# Altium PCB showroom_v1_pcb.PcbDoc
Units mil, origin at the board's own origin, x right, y up, seen from the top; angles counter-clockwise.
Board outline 6102.36 x 2362.2 mil, 2 copper layers (Top Layer, Bottom Layer); 89 components, 68 nets, 263 pads, 86 vias.
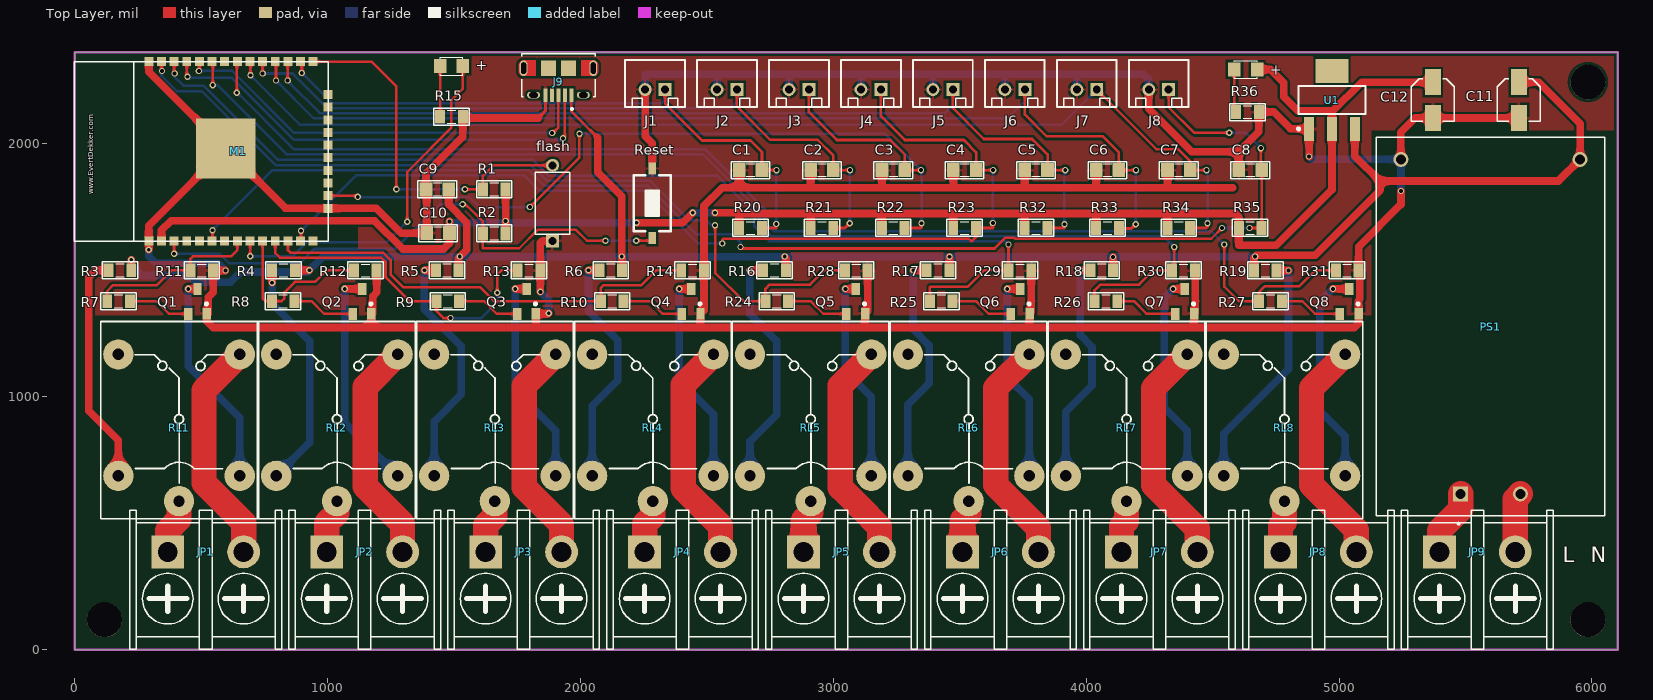
[diagram p0: Top Layer view]
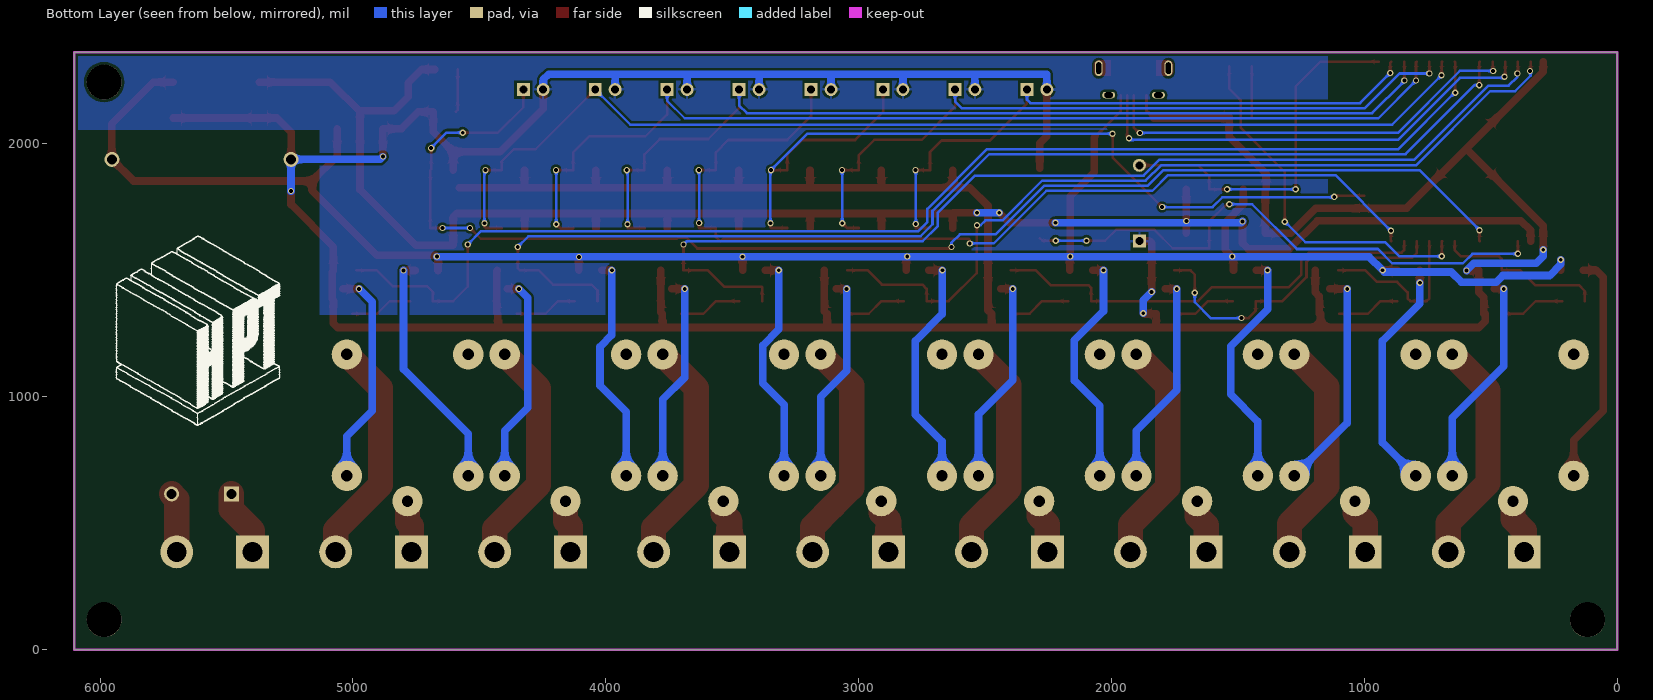
[diagram p1: Bottom Layer view, seen from below]
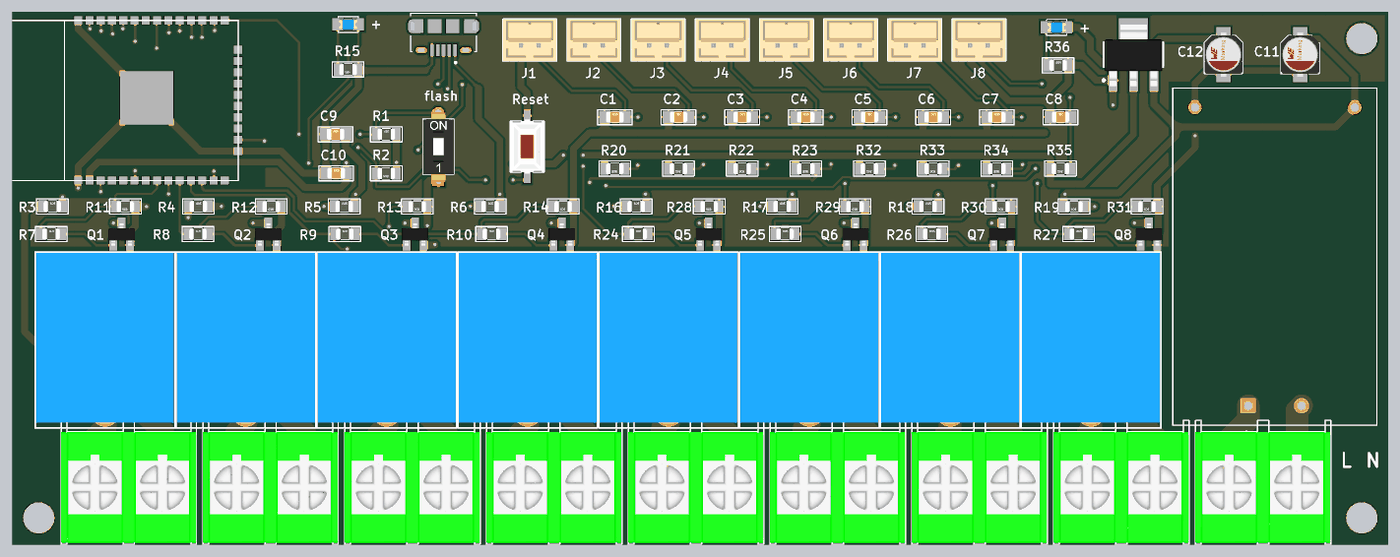
[diagram p2: 3D render of the assembled board from above, using the file's embedded part models]

## Layer stack, top to bottom
Top Solder: solder mask 0.4, Solder Resist, Dk 3.5
Top Layer: signal copper 1.4
Dielectric 1: dielectric 12.6, FR-4, Dk 4.8
Bottom Layer: signal copper 1.4
Bottom Solder: solder mask 0.4, Solder Resist, Dk 3.5

## Board outline
0,0 0,2362.2 6102.36,2362.2 6102.36,0

## Design rules (kind name [scope] priority, off if disabled: settings)
Clearance [All] p1: gap=10
PolygonConnect [All] p1: connectstyle=Relief reliefconductorwidth=10 reliefentries=4 polygonreliefangle="90 Angle" airgapwidth=10
RoomDefinition showroom_v1_schematic [InComponentClass('showroom_v1_schematic')] p1: confinementstyle=ConfineIn formatcopy=TRUE lockcomponents=FALSE outline 6369.13,-30 27524.13,-30 27524.13,1630 6369.13,1630
RoutingVias [All] p1: holewidth=15 width=25 viastyle="Through Hole" minholewidth=15 minwidth=25 maxholewidth=25 maxwidth=70
SolderMaskExpansion [All] p1: expansion=4
Width [All] p1: maxlimit=120 minlimit=10 preferedwidth=10
30 further rules are at their usual default settings.

## Components (designator, comment, footprint, x,y, rotation, side; value= is the part's Value field where it differs from the comment)
+ "LED" LED-0805-Blue 4676,2294 r180 top (schematic designator LED2)
+ "LED" LED-0805-Blue 1535,2307 r180 top (schematic designator LED1)
C1 "104" SM-CAP-0805 2628,1896 r0 top
C2 "104" SM-CAP-0805 2910.29,1896 r0 top
C3 "104" SM-CAP-0805 3192.57,1896 r0 top
C4 "104" SM-CAP-0805 3474.86,1896 r0 top
C5 "104" SM-CAP-0805 3757.14,1896 r0 top
C6 "104" SM-CAP-0805 4039.43,1896 r0 top
C7 "104" SM-CAP-0805 4321.71,1896 r0 top
C8 "104" SM-CAP-0805 4604,1896 r0 top
C9 "104" SM-CAP-0805 1389,1820 r0 top
C10 "104" SM-CAP-0805 1392,1647 r0 top
C11 "CN-ALU-SMD" CAP-ALU-SMD-4.5x5x1.4 5711,2173 r270 top
C12 "CN-ALU-SMD" CAP-ALU-SMD-4.5x5x1.4 5371,2173 r270 top
flash "SW" SW-DIP1 1890,1765 r0 top (schematic designator flash1)
J1 "62000211622" 62000211622 2295.13,2238 r0 top
J2 "62000211622" 62000211622 2579.69,2238 r0 top
J3 "62000211622" 62000211622 2864.24,2238 r0 top
J4 "62000211622" 62000211622 3148.79,2238 r0 top
J5 "62000211622" 62000211622 3433.34,2238 r0 top
J6 "62000211622" 62000211622 3717.9,2238 r0 top
J7 "62000211622" 62000211622 4002.45,2238 r0 top
J8 "62000211622" 62000211622 4287,2238 r0 top
J9 "10118194-0001LF" AMPHENOL_10118194-0001LF 1913,2299 r180 top
JP1 "JP2" "CON 2/7.62mm" 368,386 r0 top
JP2 "JP2" "CON 2/7.62mm" 996.62,386 r0 top
JP3 "JP2" "CON 2/7.62mm" 1625.25,386 r0 top
JP4 "JP2" "CON 2/7.62mm" 2253.88,386 r0 top
JP5 "JP2" "CON 2/7.62mm" 2882.5,386 r0 top
JP6 "JP2" "CON 2/7.62mm" 3511.12,386 r0 top
JP7 "JP2" "CON 2/7.62mm" 4139.75,386 r0 top
JP8 "JP2" "CON 2/7.62mm" 4768.38,386 r0 top
JP9 "JP2" "CON 2/7.62mm" 5397,386 r0 top
M1 "ESP32S_Module" ESP32S 1003,1615 r90 top
PS1 "HLK-5M05" CONV_HLK-5M05 5599,1277 r90 top
Q1 "C1815" SOT23B 485.55,1377 r0 top
Q2 "C1815" SOT23B 1136.27,1377 r0 top
Q3 "C1815" SOT23B 1786.98,1377 r0 top
Q4 "C1815" SOT23B 2437.7,1377 r0 top
Q5 "C1815" SOT23B 3088.42,1377 r0 top
Q6 "C1815" SOT23B 3739.14,1377 r0 top
Q7 "C1815" SOT23B 4389.86,1377 r0 top
Q8 "C1815" SOT23B 5040.57,1377 r0 top
R1 "10K" RES-SMD-0805 1659,1820 r0 top
R2 "10K" RES-SMD-0805 1659,1646 r180 top
R3 "1K" RES-SMD-0805 178.63,1500 r0 top
R4 "1K" RES-SMD-0805 825.77,1500 r0 top
R5 "1K" RES-SMD-0805 1472.9,1500 r0 top
R6 "1K" RES-SMD-0805 2120.03,1500 r0 top
R7 "1K" RES-SMD-0805 173.63,1377.5 r0 top
R8 "1K" RES-SMD-0805 824.35,1377.5 r0 top
R9 "1K" RES-SMD-0805 1475.07,1377.5 r0 top
R10 "1K" RES-SMD-0805 2125.79,1377.5 r0 top
R11 "10K" RES-SMD-0805 502.2,1499 r180 top
R12 "10K" RES-SMD-0805 1149.33,1499 r180 top
R13 "10K" RES-SMD-0805 1796.47,1499 r180 top
R14 "10K" RES-SMD-0805 2443.6,1499 r180 top
R15 "1K" RES-SMD-0805 1490,2107 r180 top
R16 "1K" RES-SMD-0805 2767.17,1500 r0 top
R17 "1K" RES-SMD-0805 3414.3,1500 r0 top
R18 "1K" RES-SMD-0805 4061.43,1500 r0 top
R19 "1K" RES-SMD-0805 4708.57,1499 r180 top
R20 "10K" RES-SMD-0805 2672.5,1667 r180 top
R21 "10K" RES-SMD-0805 2954.79,1667 r180 top
R22 "10K" RES-SMD-0805 3237.07,1667 r180 top
R23 "10K" RES-SMD-0805 3519.36,1667 r180 top
R24 "1K" RES-SMD-0805 2776.51,1377.5 r0 top
R25 "1K" RES-SMD-0805 3427.22,1377.5 r0 top
R26 "1K" RES-SMD-0805 4077.94,1377.5 r0 top
R27 "1K" RES-SMD-0805 4728.66,1377.5 r0 top
R28 "10K" RES-SMD-0805 3090.73,1499 r180 top
R29 "10K" RES-SMD-0805 3737.87,1499 r180 top
R30 "10K" RES-SMD-0805 4385,1499 r180 top
R31 "10K" RES-SMD-0805 5032.13,1499 r180 top
R32 "10K" RES-SMD-0805 3801.64,1667 r180 top
R33 "10K" RES-SMD-0805 4083.93,1667 r180 top
R34 "10K" RES-SMD-0805 4366.21,1667 r180 top
R35 "10K" RES-SMD-0805 4648.5,1667 r180 top
R36 "1K" RES-SMD-0805 4638,2126 r0 top
Reset "SW" SW1-SMD 2284,1765 r90 top (schematic designator Reset1)
RL1 "Relay 10A/12V" "RELAY 5" 412.63,912 r90 top
RL2 "Relay 10A/12V" "RELAY 5" 1037.13,912 r90 top
RL3 "Relay 10A/12V" "RELAY 5" 1661.63,912 r90 top
RL4 "Relay 10A/12V" "RELAY 5" 2286.13,912 r90 top
RL5 "Relay 10A/12V" "RELAY 5" 2910.63,912 r90 top
RL6 "Relay 10A/12V" "RELAY 5" 3535.13,912 r90 top
RL7 "Relay 10A/12V" "RELAY 5" 4159.63,912 r90 top
RL8 "Relay 10A/12V" "RELAY 5" 4784.13,912 r90 top
U1 "LM1117-3.3V" SOT223 4972,2173 r0 top

## Footprints (in the part's own frame and the unit in brackets; to place one, negate y for a bottom-side part, rotate by r counter-clockwise, add the part's x,y. Pads: shape width x height; smd on the part's side, far side on the other; paste and mask are expansions set on the pad)
62000211622 [mm] "2.00mm Male Vertical Shrouded Header, 2p"
  rect 1.3x1.3 hole 0.8: 1(1,-0.6)
  round 1.3 hole 0.8: 2(-1,-0.6)
  silkscreen extent -3,-2.35 3,2.35, body extent -3,-2.35 3,2.35, height 6.15
AMPHENOL_10118194-0001LF [mm]
  rect 0.4x1.35 smd: 1(-1.3,2.7) 2(-0.65,2.7) 3(0,2.7) 4(0.65,2.7) 5(1.3,2.7)
  oval 1.3x0.65 hole 0.55 slot 0.85 at 0 deg: S1(-2.5,2.7) S2(2.5,2.7)
  oval 0.775x1.55 hole 0.5 slot 1.15 at 90 deg: S3(-3.5,0) S6(3.5,0)
  rect 1.5x1.55 smd: S4(-1,0) S5(1,0)
  Top Layer region: 193 vertices and 0 holes, not listed, extent 2.3,-0.78 4,0.775
  Top Layer region: 193 vertices and 0 holes, not listed, extent -4,-0.775 -2.3,0.78
  silkscreen extent -3.7,-1.45 3.7,4.2
CAP-ALU-SMD-4.5x5x1.4 [mm]
  rect 2.6x1.6 smd: 1(-1.8,0) 2(1.8,0)
  silkscreen extent -2.15,-2.15 2.15,2.15, body extent -2.5,-2.15 2.5,2.15, height 5.45
"CON 2/7.62mm" [mm] "CON 2 HB9500-2P 9.5MM"
  rect 3.3x3.3 hole 2: 1(0,0)
  round 3.3 hole 2: 2(7.62,0)
  silkscreen extent -3.81,-9.78 11.43,4.19, body extent -3.84,-9.63 11.4,2.87, height 12.5
CONV_HLK-5M05 [mm]
  rect 1.5x1.5 hole 1: 1(-16.8,3)
  round 1.5 hole 1: 2(-16.8,-3) 3(16.8,9) 4(16.8,-9)
  silkscreen extent -19.9,-11.5 19,11.5
ESP32S [mm] "ESP32S-Module"
  rect 0.9x0.9 smd: 1(0,18.034) 2(0,16.764) 3(0,15.494) 4(0,14.224) 5(0,12.954) 6(0,11.684) 7(0,10.414) 8(0,9.144) 9(0,7.874) 10(0,6.604) 11(0,5.334) 12(0,4.064) 13(0,2.794) 14(0,1.524) 15(3.3,0.034) 16(4.57,0.034) 17(5.84,0.034) 18(7.11,0.034) 19(8.38,0.034) 20(9.65,0.034) 21(10.92,0.034) 22(12.19,0.034) 23(13.46,0.034) 24(14.73,0.034) 25(18.034,1.524) 26(18.034,2.794) 27(18.034,4.064) 28(18.034,5.334) 29(18.034,6.604) 30(18.034,7.874) 31(18.034,9.144) 32(18.034,10.414) 33(18.034,11.684) 34(18.034,12.954) 35(18.034,14.224) 36(18.034,15.494) 37(18.034,16.764) 38(18.034,18.034)
  rect 6x6 smd: 101(9.3,10.3)
  silkscreen extent 0,0 18.03,25.53, body extent 0,0 18.03,25.53, height 2
LED-0805-Blue [mil]
  rect 50x55 smd: 1(0,0) 2(90,0)
  silkscreen extent 0,-35 90,35, body extent 5,-25 85,25, height 43
"RELAY 5" [mil] "Reley DPDT, 8 pin, 1A, W400mil, L800mil,H 300mil"
  round 120 hole 45: 1(-325,0) 2(255,240) 3(255,-240) 4(-225,-240) 5(-225,240)
  silkscreen extent -395,-310 385,310, body extent -371,-304 381,306, height 602
RES-SMD-0805 [mil]
  rect 39.37x55 smd: 1(-45,0) 2(45,0)
  silkscreen extent -70,-34 70,33, body extent -39,-25 39,25, height 31
SM-CAP-0805 [mil]
  rect 50x55 smd: 1(0,0) 2(90,0)
  silkscreen extent -32,-34 121,33, body extent 6,-25 84,25, height 31
SOT23B [mm] "SOT 23B"
  rect 0.85x1.2 smd: 1(0.94,-1.245) 2(0,1.25) 3(-0.95,-1.25)
  silkscreen extent 0.77,-0.38 1.02,-0.13, body extent -1.5,-1.3 1.5,1.2, height 1.06
SOT223 [mm]
  rect 1x2.4 smd: 1(-2.3,-2.9) 2(0,-2.9) 3(2.3,-2.9)
  rect 3.3x2.4 smd: 4(0,2.9)
  silkscreen extent -3.47,-3.02 3.35,1.4, body extent -3.25,-3.56 3.25,3.4, height 1.68
SW1-SMD [mm]
  rect 1.2x0.8 smd: 1(-3.5,0) 2(3.5,0)
  silkscreen extent -2.82,-1.85 2.82,1.85, body extent -3.05,-1.85 3.05,1.85, height 2.5
SW-DIP1 [mm]
  rect 1.3x1.3 hole 0.8: 1(0,-3.81)
  round 1.3 hole 0.8: 2(0,3.81)
  silkscreen extent -1.74,-3.1 1.74,3.1, body extent -1.74,-3.98 1.74,3.89, height 3.95

## Part data
+ +: library part "LED SMD"
C1 C2 C3 C4 C5 C6 C7 C8 C9 C10: library part CN
C11 C12: "Polarized Capacitor (Axial)"
flash Reset: library part SW2, "Switch button 2 pin"
J1 J2 J3 J4 J5 J6 J7 J8: "WR-WTB 2.00mm Male Vertical Shrouded Header, 2p"
J9: "USB - micro B USB 2.0 Receptacle Connector 5 Position Surface Mount, Right Angle; Through Hole"
JP1 JP2 JP3 JP4 JP5 JP6 JP7 JP8 JP9: library part Con2, "Connector 2"
M1: "Esp-32S"
PS1: "AC DC 220V to 5V 5W 5Watt Isolated Switching Step-Down Power Supply Module Converter"
Q1 Q2 Q3 Q4 Q5 Q6 Q7 Q8: "NPN 600mW, ECB"
R1 R2 R3 R4 R5 R6 R7 R8 R9 R10 R11 R12 R13 R14 R15 R16 R17 R18 R19 R20 R21 R22 R23 R24 R25 R26 R27 R28 R29 R30 R31 R32 R33 R34 R35 R36: library part Res-SMD, "Resistor"
RL1 RL2 RL3 RL4 RL5 RL6 RL7 RL8: library part "Relay 5", "Relay SPDT,10A - 12VDC 5 Pin"
U1: library part LM1117, "800mA Low-Dropout Linear Regulator"

## Free pads (board coordinates)
  round 137.8 hole 137.8: 1(118.11,118.11) 1(5984.25,118.11) 1(5984.25,2244.09)

## Via types
v1: diameter 25, hole 15, Top Layer to Bottom Layer, tented both sides, 86 vias

## Nets (pads, with @x,y where several pads share a name; then routed paths per layer and width w, separated by ;. In a path a pad name is that pad's centre, name@x,y a point inside that pad or via, vN(x,y) a via of type N, cw(c..) or ccw(c..) an arc to the next point about the centre after c; other vN are vias at no path point)
3.3V: +.1@4676,2294 C10.2 C12.1 M1.2 R1.2 R2.1 R20.2 R21.2 R22.2 R23.2 R32.2 R33.2 R34.2 R35.2 U1.2 | length 6764.4
  Top Layer w30: M1.2 343,1658 381,1696 1185.43,1696 1297.43,1584 1459,1584 1482,1607 C10.2 v1(1482,1693) ; R2.1 v1(1704,1695) R1.2 ; v1(2222,1688) 2405,1688 v1(2444,1727) ; v1(2532,1727) 2625,1727 ; R20.2 2627.5,1724.5 4589.5,1724.5 4603.5,1710.5 R35.2 4603.5,1599.5 4752.5,1599.5 4972,1819 U1.2 4972,2126 ; R21.2 2909.79,1722.29 ; R22.2 3192.07,1724.43 ; R23.2 3474.36,1717.14 ; R32.2 3756.64,1717.15 ; R33.2 4038.93,1724.43 ; R34.2 4321.22,1724.29 ; +.1@4676,2294 4728,2294 4781,2241 4781,2187 4836.93,2131.07 4966.93,2131.07 4972,2126 ; C12.1 5089.87,2243.87 4972,2126
  Bottom Layer w30: v1(1482,1693) 1487,1688 v1(2222,1688) ; v1(2444,1727) v1(2532,1727)
5V: C9.2 C11.1 J9.1 PS1.4 R3.2 R4.2 R5.2 R6.2 R16.2 R17.2 R18.2 R19.2 U1.3 | length 8147.9
  Top Layer w10: J9.1 1964.18,2127.82 2068,2024
  Top Layer w30: R3.2 v1(223.63,1541.37) ; R4.2 v1(928,1500) ; C9.2 1479,1760 1551,1688 1551,1581 v1@1523.5,1553.5 ; R5.2 v1@1517.9,1547.9 ; 2068,2024 2068,1887 2163,1792 v1(2163,1554) 2165.03,1551.97 R6.2 ; v1(2808,1554) 2812.17,1549.83 R16.2 ; R17.2 v1(3459.3,1553.7) ; R18.2 v1(4106.43,1552.57) ; R19.2 4663.57,1549.57 v1(4668,1554) 4673.5,1559.5 4906.5,1559.5 5161,1814 5161,1853 ; U1.3 5062.55,1951.45 5161,1853 ; C11.1 5789.13,2243.87 5953.33,2079.67 PS1.4 5867.91,1853 5161,1853
  Bottom Layer w30: v1(223.63,1541.37) 223.63,1523.37 268,1479 452.57,1479 478.57,1453 616,1453 656,1493 921,1493 v1(928,1500) 982,1554 v1(1523,1554) v1(2163,1554) v1(2808,1554) v1(4668,1554)
GND: C1.1 C2.1 C3.1 C4.1 C5.1 C6.1 C7.1 C8.1 C9.1 C10.1 C11.2 C12.2 flash.1 J1.2 J2.2 J3.2 J4.2 J5.2 J6.2 J7.2 J8.2 J9.5 M1.1 M1.15 M1.38 M1.101 PS1.3 Q1.1 Q2.1 Q3.1 Q4.1 Q5.1 Q6.1 Q7.1 Q8.1 R11.1 R12.1 R13.1 R14.1 R15.1 R28.1 R29.1 R30.1 R31.1 R36.2 Reset.2 U1.1 | length 18013.2
  Top Layer w10: 1833,2102 1861.82,2130.82 J9.5
  Top Layer w30: v1(293,1581.37) M1.1 293,1676.65 M1.101 ; M1.38 293,2285.63 M1.101 ; v1(596,1499) R11.1 547.2,1413.2 527.28,1393.28 527.28,1328 Q1.1 522.55,1298.45 547.5,1273.5 1173.27,1273.5 ; R12.1 1194.34,1412.34 1178,1396 1178,1328 Q2.1 1173.27,1273.5 ; 1823.98,1279.48 Q3.1 1873,1328 v1(1875,1330) ; 1833,2102 1540,2102 R15.1 1535,2027 1389,1881 C9.1 1392,1817 C10.1 1291,1647 1193.08,1744.92 M1.15 833.71,1744.92 M1.101 ; v1(1841.47,1414.47) R13.1 1841.47,1608.47 1848,1615 flash.1 ; J1.2 2255.76,2030.24 2284,2002 Reset.2 ; 2474.7,1274.2 Q4.1 2488.6,1341.9 R14.1 2488.6,1754.6 2560,1826 2628,1826 ; C1.1 2628,1826 ; 2910.29,1828.29 C2.1 ; 3125.42,1274.08 Q5.1 ; Q5.1@3135.73,1338.31 R28.1 ; 3192.57,1833.57 C3.1 ; 3474.86,1830.86 C4.1 ; 3757.14,1828.14 C5.1 ; 3776.14,1273.64 Q6.1 ; Q6.1@3782.87,1334.73 R29.1 ; 4039.43,1832.43 C6.1 ; J8.2 4247.63,2139.37 4418,1969 4604,1969 ; 4321.71,1834.71 C7.1 ; 4426.86,1273.64 Q7.1 4431.59,1332.73 4431.59,1497.41 R30.1 ; 4579,1826 2628,1826 ; C8.1 4604,1969 ; v1(4881.45,1949.55) U1.1 4808.17,2058.83 4741,2126 R36.2 4683,2048 4604,1969 ; PS1.3 5244.67,2045.67 5301.13,2102.13 C12.2 C11.2 ; v1(5245,1813) 5245,1760 5077.13,1592.13 R31.1 5082.31,1493.83 5082.31,1387.06 5077.13,1381.89 5077.13,1290.13 5060.5,1273.5 1173.27,1273.5
  Bottom Layer w30: v1(293,1581.37) 293,1555 321,1527 568,1527 v1(596,1499) ; v1(1841.47,1414.47) 1875,1380.94 v1(1875,1330) ; J1.2 2255.76,2275.76 4226.24,2275.76 4247.63,2254.37 J8.2 ; J2.2 2540.32,2271.08 ; J3.2 2824.87,2273.63 ; J4.2 3109.42,2275.18 ; J5.2 3393.97,2274.74 ; J6.2 3678.53,2275.29 ; J7.2 3963.08,2270.69 ; v1(4881.45,1949.55) 4892.58,1938.42 PS1.3 5245,1938.09 v1(5245,1813)
IN1: C1.2 J1.1 M1.26 R20.1 | length 2510.4
  Top Layer w10: M1.26 898,2320 v1(898,2280) ; J1.1 2334.5,2159.5 2481,2013 2672,2013 2718,1967 C1.2 v1(2775,1896) ; R20.1 2774,1667 v1(2774,1683)
  Bottom Layer w10: v1(898,2280) 1017,2161 2321,2161 2334.5,2174.5 J1.1 ; v1(2774,1683) 2774,1895 v1(2775,1896)
IN2: C2.2 J2.1 M1.29 R21.1 | length 2973.5
  Top Layer w10: v1(743,2278) M1.29 ; J2.1 2619.06,2146.94 2750,2016 2938,2016 3000.29,1953.71 C2.2 v1(3066,1896) ; R21.1 3046,1667 v1(3065,1686)
  Bottom Layer w10: v1(743,2278) 861.11,2278 998.11,2141 2593,2141 2619.06,2167.06 J2.1 ; v1(3065,1686) 3065,1895 v1(3066,1896)
IN3: C3.2 J3.1 M1.16 R22.1 | length 3557.2
  Top Layer w10: M1.16 1114.08,1794.92 v1(1119,1790) ; v1(1800,1750) 1996,1946 v1(1996,2040) ; J3.1 2903.61,2125.39 3014,2015 3225,2015 3282.57,1957.43 C3.2 v1(3347,1896) ; R22.1 3346,1667 3349,1670 v1(3349,1686)
  Bottom Layer w10: v1(1119,1790) 1120.5,1788.5 1561.5,1788.5 1600,1750 v1(1800,1750) ; v1(1996,2040) 3203,2040 v1(3347,1896) 3349,1894 v1(3349,1686)
IN4: C4.2 J4.1 M1.13 R23.1 | length 3951.3
  Top Layer w10: M1.13 895,1617 v1(895,1656) ; v1(2561,1606) 2561,1620 2565.5,1624.5 3536.5,1624.5 3547,1614 3564.36,1631.36 R23.1 3631,1667 v1(3631,1687) ; J4.1 3188.16,2109.84 3283,2015 3516,2015 3564.86,1966.14 C4.2 v1(3632,1896)
  Bottom Layer w10: v1(895,1656) 1115,1876 1777,1876 1838.59,1814.41 2257.6,1814.41 2466.01,1606 v1(2561,1606) ; v1(3631,1687) 3631,1895 v1(3632,1896)
IN5: C5.2 J5.1 M1.27 R32.1 | length 3799.8
  Top Layer w10: v1(842,2250) 842,2324 M1.27 ; J5.1 3472.71,2141.29 3595,2019 3786,2019 3847.14,1957.86 C5.2 v1(3917,1896) ; R32.1 3913,1667 3914,1668 v1(3914,1682)
  Bottom Layer w10: v1(842,2250) 848,2256 848,2243 970,2121 3442,2121 3472.71,2151.71 J5.1 ; v1(3914,1682) 3914,1893 v1(3917,1896)
IN6: C6.2 J6.1 M1.28 R33.1 | length 4131.5
  Top Layer w10: M1.28 796,2322 v1(796,2250) ; J6.1 3757.27,2115.73 3844,2029 4066,2029 4129.43,1965.57 C6.2 v1(4197,1896) ; R33.1 4130.93,1665 4179,1665 v1(4196,1682)
  Bottom Layer w10: v1(796,2250) 945,2101 3688,2101 3757.27,2170.27 J6.1 ; v1(4196,1682) 4196,1895 v1(4197,1896)
IN7: C7.2 J7.1 M1.30 R34.1 | length 4421.8
  Top Layer w10: M1.30 695,2323 v1(695,2271) ; J7.1 4277.2,1979 4363,1979 4411.71,1930.29 C7.2 v1(4476,1896) ; R34.1 4474,1667 4480,1673 v1(4480,1686)
  Bottom Layer w10: v1(695,2271) 890,2076 3903.44,2076 J7.1 ; v1(4476,1896) 4480,1892 v1(4480,1686)
IN8: C8.2 J8.1 M1.6 R35.1 | length 5287.6
  Top Layer w10: M1.6 545,1617 v1(545,1658) ; v1(2633,1592) 2639,1586 3638.11,1586 3681.48,1629.37 3715.5,1629.37 3720.37,1624.5 4494.5,1624.5 v1(4537,1667) ; J8.1 4326.37,2144.63 4427,2044 v1(4566,2044) ; v1(4646,1667) R35.1 4694,1667.5 C8.2 4691,1899 v1(4691,1983)
  Bottom Layer w10: v1(545,1658) 545,1659 782,1896 1795.03,1896 1856.62,1834.41 2265.88,1834.41 2458.29,1642 2600,1642 2633,1609 v1(2633,1592) v1@2632,1593 ; v1(4537,1667) v1(4646,1667) ; v1(4566,2044) 4630,2044 v1(4691,1983)
Netflash1_2: flash.2 M1.25 R1.1 | length 1465
  Top Layer w10: M1.25 1174,2325 1272,2227 v1(1272,1820) ; v1(1543,1820) R1.1 1614,1873 1656,1915 flash.2
  Bottom Layer w10: v1(1272,1820) v1(1543,1820)
NetJP1_1: JP1.1 RL1.1 | length 219.5
  Top Layer w100: JP1.1 368,471 412.63,515.63 RL1.1
NetJP1_2: JP1.2 RL1.3 | length 904.7
  Top Layer w100: RL1.3 511,1025.37 511,658.93 668,501.93 JP1.2
NetJP2_1: JP2.1 RL2.1 | length 217.8
  Top Layer w100: JP2.1 996.62,499.62 1037.13,540.13 RL2.1
NetJP2_2: JP2.2 RL2.3 | length 895.2
  Top Layer w100: RL2.3 1149,1038.87 1149,645 1296.62,497.38 JP2.2
NetJP3_1: JP3.1 RL3.1 | length 216.1
  Top Layer w100: JP3.1 1625.25,491.25 1661.63,527.63 RL3.1
NetJP3_2: JP3.2 RL3.3 | length 893.2
  Top Layer w100: RL3.3 1778,1043.37 1778,640.93 1925.25,493.68 JP3.2
NetJP4_1: JP4.1 RL4.1 | length 214.4
  Top Layer w100: JP4.1 2253.88,495.88 2286.13,528.13 RL4.1
NetJP4_2: JP4.2 RL4.3 | length 891.9
  Top Layer w100: RL4.3 2406.13,1047 2406.13,637.29 2553.88,489.55 JP4.2
NetJP5_1: JP5.1 RL5.1 | length 212.7
  Top Layer w100: JP5.1 2882.5,512.5 2910.63,540.63 RL5.1
NetJP5_2: JP5.2 RL5.3 | length 895.8
  Top Layer w100: RL5.3 3028,1044.37 3028,639.93 3100.93,567 3101,567 3182.5,485.5 JP5.2
NetJP6_1: JP6.1 RL6.1 | length 210.9
  Top Layer w100: JP6.1 3511.12,513.12 3535.13,537.13 RL6.1
NetJP6_2: JP6.2 RL6.3 | length 906.2
  Top Layer w100: RL6.3 3642,1033.87 3642,650.43 3811.12,481.3 JP6.2
NetJP7_1: JP7.1 RL7.1 | length 209.2
  Top Layer w100: JP7.1 4139.75,487.75 4159.63,507.63 RL7.1
NetJP7_2: JP7.2 RL7.3 | length 908.3
  Top Layer w100: RL7.3 4266,1033.37 4266,650.93 4439.75,477.18 JP7.2
NetJP8_1: JP8.1 RL8.1 | length 207.5
  Top Layer w100: JP8.1 4768.38,488.38 4784.13,504.13 RL8.1
NetJP8_2: JP8.2 RL8.3 | length 909.6
  Top Layer w100: RL8.3 4891,1033.87 4891,650.43 5068.38,473.05 JP8.2
NetJP9_1: JP9.1 PS1.1 | length 264.3
  Top Layer w100: JP9.1 5397,470 5480.89,553.89 PS1.1
NetJP9_2: JP9.2 PS1.2 | length 237.9
  Top Layer w100: JP9.2 5697,595.47 PS1.2
NetLED1_1: +.1@1535,2307 M1.9 | length 1444.3
  Top Layer w10: M1.9 694,1614 v1(694,1555) ; v1(1315,1692) 1315,1889 1490,2064 1490,2173 1535,2218 +.1@1535,2307
  Bottom Layer w10: v1(694,1555) 862,1555 918,1611 1234,1611 v1(1315,1692)
NetLED1_2: +.2@1445,2307 R15.2 | length 200
  Top Layer w10: R15.2 +.2@1445,2307
NetLED2_2: +.2@4586,2294 R36.1 | length 170.9
  Top Layer w10: +.2@4586,2294 4586,2133 R36.1
NetM1_3: M1.3 R2.2 Reset.1 | length 2239.9
  Top Layer w10: v1(393,1565) M1.3 ; v1(1534,1761) 1545,1761 1614,1692 R2.2 1614,1587 1758,1587 1832,1661 1981,1661 2025,1617 v1(2099,1617) ; v1(2221,1617) 2273.8,1617 Reset.1
  Bottom Layer w10: v1(393,1565) 573,1565 610.5,1527.5 890.5,1527.5 947,1584 1267,1584 1444,1761 v1(1534,1761) ; v1(2099,1617) v1(2221,1617)
NetQ1_2: Q1.2 RL1.4 | length 860.4
  Top Layer w30: v1(448.79,1426.21) Q1.2
  Bottom Layer w30: v1(448.79,1426.21) 448.79,1120.21 652.63,916.37 RL1.4
NetQ1_3: Q1.3 R7.2 | length 250.1
  Top Layer w10: R7.2 322.5,1377.5 372.21,1327.79 Q1.3
NetQ2_2: Q2.2 RL2.4 | length 893.8
  Top Layer w30: v1(1068.21,1426.21) Q2.2
  Bottom Layer w30: v1(1068.21,1426.21) 1068.21,895.92 RL2.4
NetQ2_3: Q2.3 R8.2 | length 250.1
  Top Layer w10: R8.2 936.5,1377.5 986.21,1327.79 Q2.3
NetQ3_2: Q3.2 RL3.4 | length 850
  Top Layer w30: v1(1742.21,1426.21) Q3.2
  Bottom Layer w30: v1(1742.21,1426.21) 1742.21,1024.79 1901.63,865.37 RL3.4
NetQ3_3: Q3.3 R9.2 | length 250.1
  Top Layer w10: R9.2 1618.5,1377.5 1668.21,1327.79 Q3.3
NetQ4_2: Q4.2 RL4.4 | length 842.2
  Top Layer w30: v1(2390.79,1426.21) Q4.2
  Bottom Layer w30: v1(2390.79,1426.21) 2390.79,1065.21 2526.13,929.87 RL4.4
NetQ4_3: Q4.3 R10.2 | length 250.1
  Top Layer w10: R10.2 2274.5,1377.5 2324.21,1327.79 Q4.3
NetQ5_2: Q5.2 RL5.4 | length 822.4
  Top Layer w30: v1(3047.79,1426.21) Q5.2
  Bottom Layer w30: v1(3047.79,1426.21) 3047.79,1102.21 3150.63,999.37 RL5.4
NetQ5_3: Q5.3 R24.2 | length 250.1
  Top Layer w10: R24.2 2910.5,1377.5 2960.21,1327.79 Q5.3
NetQ6_2: Q6.2 RL6.4 | length 826.1
  Top Layer w30: v1(3688.21,1426.21) Q6.2
  Bottom Layer w30: v1(3688.21,1426.21) 3688.21,1075.79 3775.13,988.87 RL6.4
NetQ6_3: Q6.3 R25.2 | length 250.1
  Top Layer w10: R25.2 3564.5,1377.5 3614.21,1327.79 Q6.3
NetQ7_2: Q7.2 RL7.4 | length 837.2
  Top Layer w30: v1(4343.79,1426.21) Q7.2
  Bottom Layer w30: v1(4343.79,1426.21) 4309,1391.43 4309,956 4399.63,865.37 RL7.4
NetQ7_3: Q7.3 R26.2 | length 250.1
  Top Layer w10: R26.2 4188.5,1377.5 4238.21,1327.79 Q7.3
NetQ8_2: Q8.2 RL8.4 | length 866.9
  Top Layer w30: v1(4975.79,1426.21) Q8.2
  Bottom Layer w30: v1(4975.79,1426.21) 4924,1374.43 4924,944 5024.13,843.87 RL8.4
NetQ8_3: Q8.3 R27.2 | length 250.1
  Top Layer w10: R27.2 4854.5,1377.5 4904.21,1327.79 Q8.3
NetR3_1: R3.1 RL1.5 | length 922.5
  Top Layer w30: R3.1 84,1500 56,1472 56,945 172.63,828.37 RL1.5
NetR4_1: R4.1 RL2.5 | length 929
  Top Layer w30: v1(780.77,1450.23) R4.1
  Bottom Layer w30: v1(780.77,1450.23) 780.77,1368.23 929,1220 929,818.87 RL2.5
NetR5_1: R5.1 RL3.5 | length 962.8
  Top Layer w30: v1(1383,1500) R5.1
  Bottom Layer w30: v1(1383,1500) 1383,1345 1529,1199 1529,1009 1421.63,901.63 RL3.5
NetR6_1: R6.1 RL4.5 | length 945.4
  Top Layer w30: v1(2032,1500) R6.1
  Bottom Layer w30: v1(2032,1500) 2032,1338 2147,1223 2147,1064 2046.13,963.13 RL4.5
NetR16_1: R16.1 RL5.5 | length 954.1
  Top Layer w30: v1(2669,1500) R16.1
  Bottom Layer w30: v1(2669,1500) 2669,1327 2776,1220 2776,929 2670.63,823.63 RL5.5
NetR17_1: R17.1 RL6.5 | length 928.1
  Top Layer w30: v1(3316,1500) R17.1
  Bottom Layer w30: RL6.5 3295.13,968.13 3380.13,1053.13 3380.13,1202.21 3316,1266.34 v1(3316,1500)
NetR18_1: R18.1 RL7.5 | length 915.7
  Top Layer w30: v1(3976,1500) R18.1
  Bottom Layer w30: RL7.5 3919.63,940.63 4023,1044 4023,1197 3976,1244 v1(3976,1500)
NetR19_1: R19.1 RL8.5 | length 964.4
  Top Layer w30: R19.1 v1(4800,1499)
  Bottom Layer w30: RL8.5 4544.13,853.13 4800,1109 v1(4800,1499)
OUT1: M1.8 R7.1 R11.2 | length 683.8
  Top Layer w10: R7.1 128.63,1417.63 152,1441 325,1441 383,1499 R11.2 457.2,1545.2 467,1555 618,1555 643,1580 M1.8
OUT2: M1.10 R8.1 R12.2 | length 656.5
  Top Layer w10: M1.10 743,1389 754.5,1377.5 R8.1 818.5,1377.5 829,1388 829,1412 871,1454 951,1454 996,1499 R12.2
OUT3: M1.11 R9.1 R13.2 | length 1311.2
  Top Layer w10: M1.11 793,1568 811,1550 1211.73,1550 1229.02,1532.71 1229.02,1472.98 1324.5,1377.5 R9.1 1430.07,1338.93 1458,1311 v1(1486,1311) ; v1(1671,1411) 1671,1483 1687,1499 R13.2
  Bottom Layer w10: v1(1486,1311) 1608,1311 1671,1374 v1(1671,1411)
OUT4: M1.12 R10.1 R14.2 | length 1789.4
  Top Layer w10: M1.12 843,1580 853,1570 1220.02,1570 1249.02,1541 1249.02,1482.98 1299,1433 1603,1433 1658,1378 2080.29,1378 R10.1 2080.79,1429.79 2092,1441 2241,1441 2299,1499 R14.2
OUT5: M1.37 R24.1 R28.2 | length 3318.8
  Top Layer w10: M1.37 343,2290 v1(345,2288) ; v1(2532,1678) 2533,1677 2533,1489 2644.5,1377.5 R24.1 2731.51,1426.51 2748,1443 2908,1443 2964,1499 R28.2
  Bottom Layer w10: v1(345,2288) 343,2286 343,2269 403.59,2208.41 502.41,2208.41 794.83,1916 1803.31,1916 1864.9,1854.41 2274.16,1854.41 2431.57,1697 2499,1697 2518,1678 v1(2532,1678)
OUT6: M1.36 R25.1 R29.2 | length 4160.3
  Top Layer w10: M1.36 393,2280 v1(395,2278) ; R25.1 3382.22,1432.22 3385,1435 3532,1435 3596,1499 R29.2 v1(3692.87,1601.87)
  Bottom Layer w10: v1(395,2278) 395,2265 430,2230 509.11,2230 803.11,1936 1811.6,1936 1873.19,1874.41 2540.02,1874.41 2688.11,1726.32 2688.11,1673.43 2747.04,1614.5 3680.24,1614.5 v1(3692.87,1601.87)
OUT7: M1.33 R26.1 R30.2 | length 4671.5
  Top Layer w10: M1.33 546,2322 v1(546,2232) ; R26.1 4032.94,1419.94 4056,1443 4209,1443 4265,1499 R30.2 4348,1507 v1(4348,1592)
  Bottom Layer w10: v1(546,2232) 564,2232 837,1959 2483.72,1959 2708.11,1734.61 2708.11,1681.72 2755.32,1634.5 4306.5,1634.5 4348,1593 v1(4348,1592)
OUT8: M1.31 R27.1 R31.2 | length 5011.8
  Top Layer w10: v1(641,2202) 641,2323 M1.31 ; v1(4546,1602) 4546,1435 4603.5,1377.5 R27.1 4683.66,1413.66 4707,1437 4843,1437 4905,1499 R31.2
  Bottom Layer w10: v1(641,2202) 643,2202 866,1979 2492,1979 2728.11,1742.89 2728.11,1690 2763.61,1654.5 4493.5,1654.5 v1(4546,1602)
RX: J9.2 M1.35 | length 1829.6
  Top Layer w10: M1.35 443,2268 v1(446,2265) ; v1(1931,2022) 1937,2022 1938.59,2023.59 J9.2
  Bottom Layer w10: v1(446,2265) 450.5,2260.5 622.22,2260.5 867.22,2015.5 1924.5,2015.5 v1(1931,2022)
TX: J9.3 M1.34 | length 1704.4
  Top Layer w10: v1(491,2288) 493,2290 M1.34 ; v1(1888,2043) 1888,2039 1913,2064 J9.3
  Bottom Layer w10: v1(491,2288) 623,2288 868,2043 v1(1888,2043)
pads on no net: J9.4 J9.S1 J9.S2 J9.S3 J9.S4 J9.S5 J9.S6 M1.4 M1.5 M1.7 M1.14 M1.17 M1.18 M1.19 M1.20 M1.21 M1.22 M1.23 M1.24 M1.32 RL1.2 RL2.2 RL3.2 RL4.2 RL5.2 RL6.2 RL7.2 RL8.2 U1.4

## Polygon pours and split planes (outlines as drawn)
GND on Top Layer "Top Layer-No Net" (solid, remove dead copper, pour order 0): 0,1534 0,1321 5127,1321 5127,2054 6099,2054 6099,2362.2 1122,2362.2 1122,1536 0,1536
GND on Bottom Layer "Top Layer-No Net" (solid, remove dead copper, pour order 4): 0,1324 5132,1324 5132,2053 5135,2056 6100,2056 6100,2367 1146,2367 1146,1326 0,1326

## Keep-outs
Keep-Out Layer:
  the board outline again, w10

## Silkscreen, mask and mechanical layers (free items; w line width, h text height)
Top Overlay:
  text "L" at 5884,345 h60
  text "N" at 5996,345 h60
Bottom Overlay:
  drawing of 2330 lines, arcs and shapes, not listed

## Text inside footprints (layer, text, board x,y; h text height)
M1: Top Overlay "www.EvertDekker.com" at 73,1800 h19.68 r90